# Altium PCB PCB_2D.PcbDoc (part 2 of 2)
Units mm, origin at the board's own origin, x right, y up, seen from the top; angles counter-clockwise.
Board outline 202 x 202 mm, 2 copper layers (Top Layer, Bottom Layer); 193 components, 102 nets, 533 pads, 52 vias.
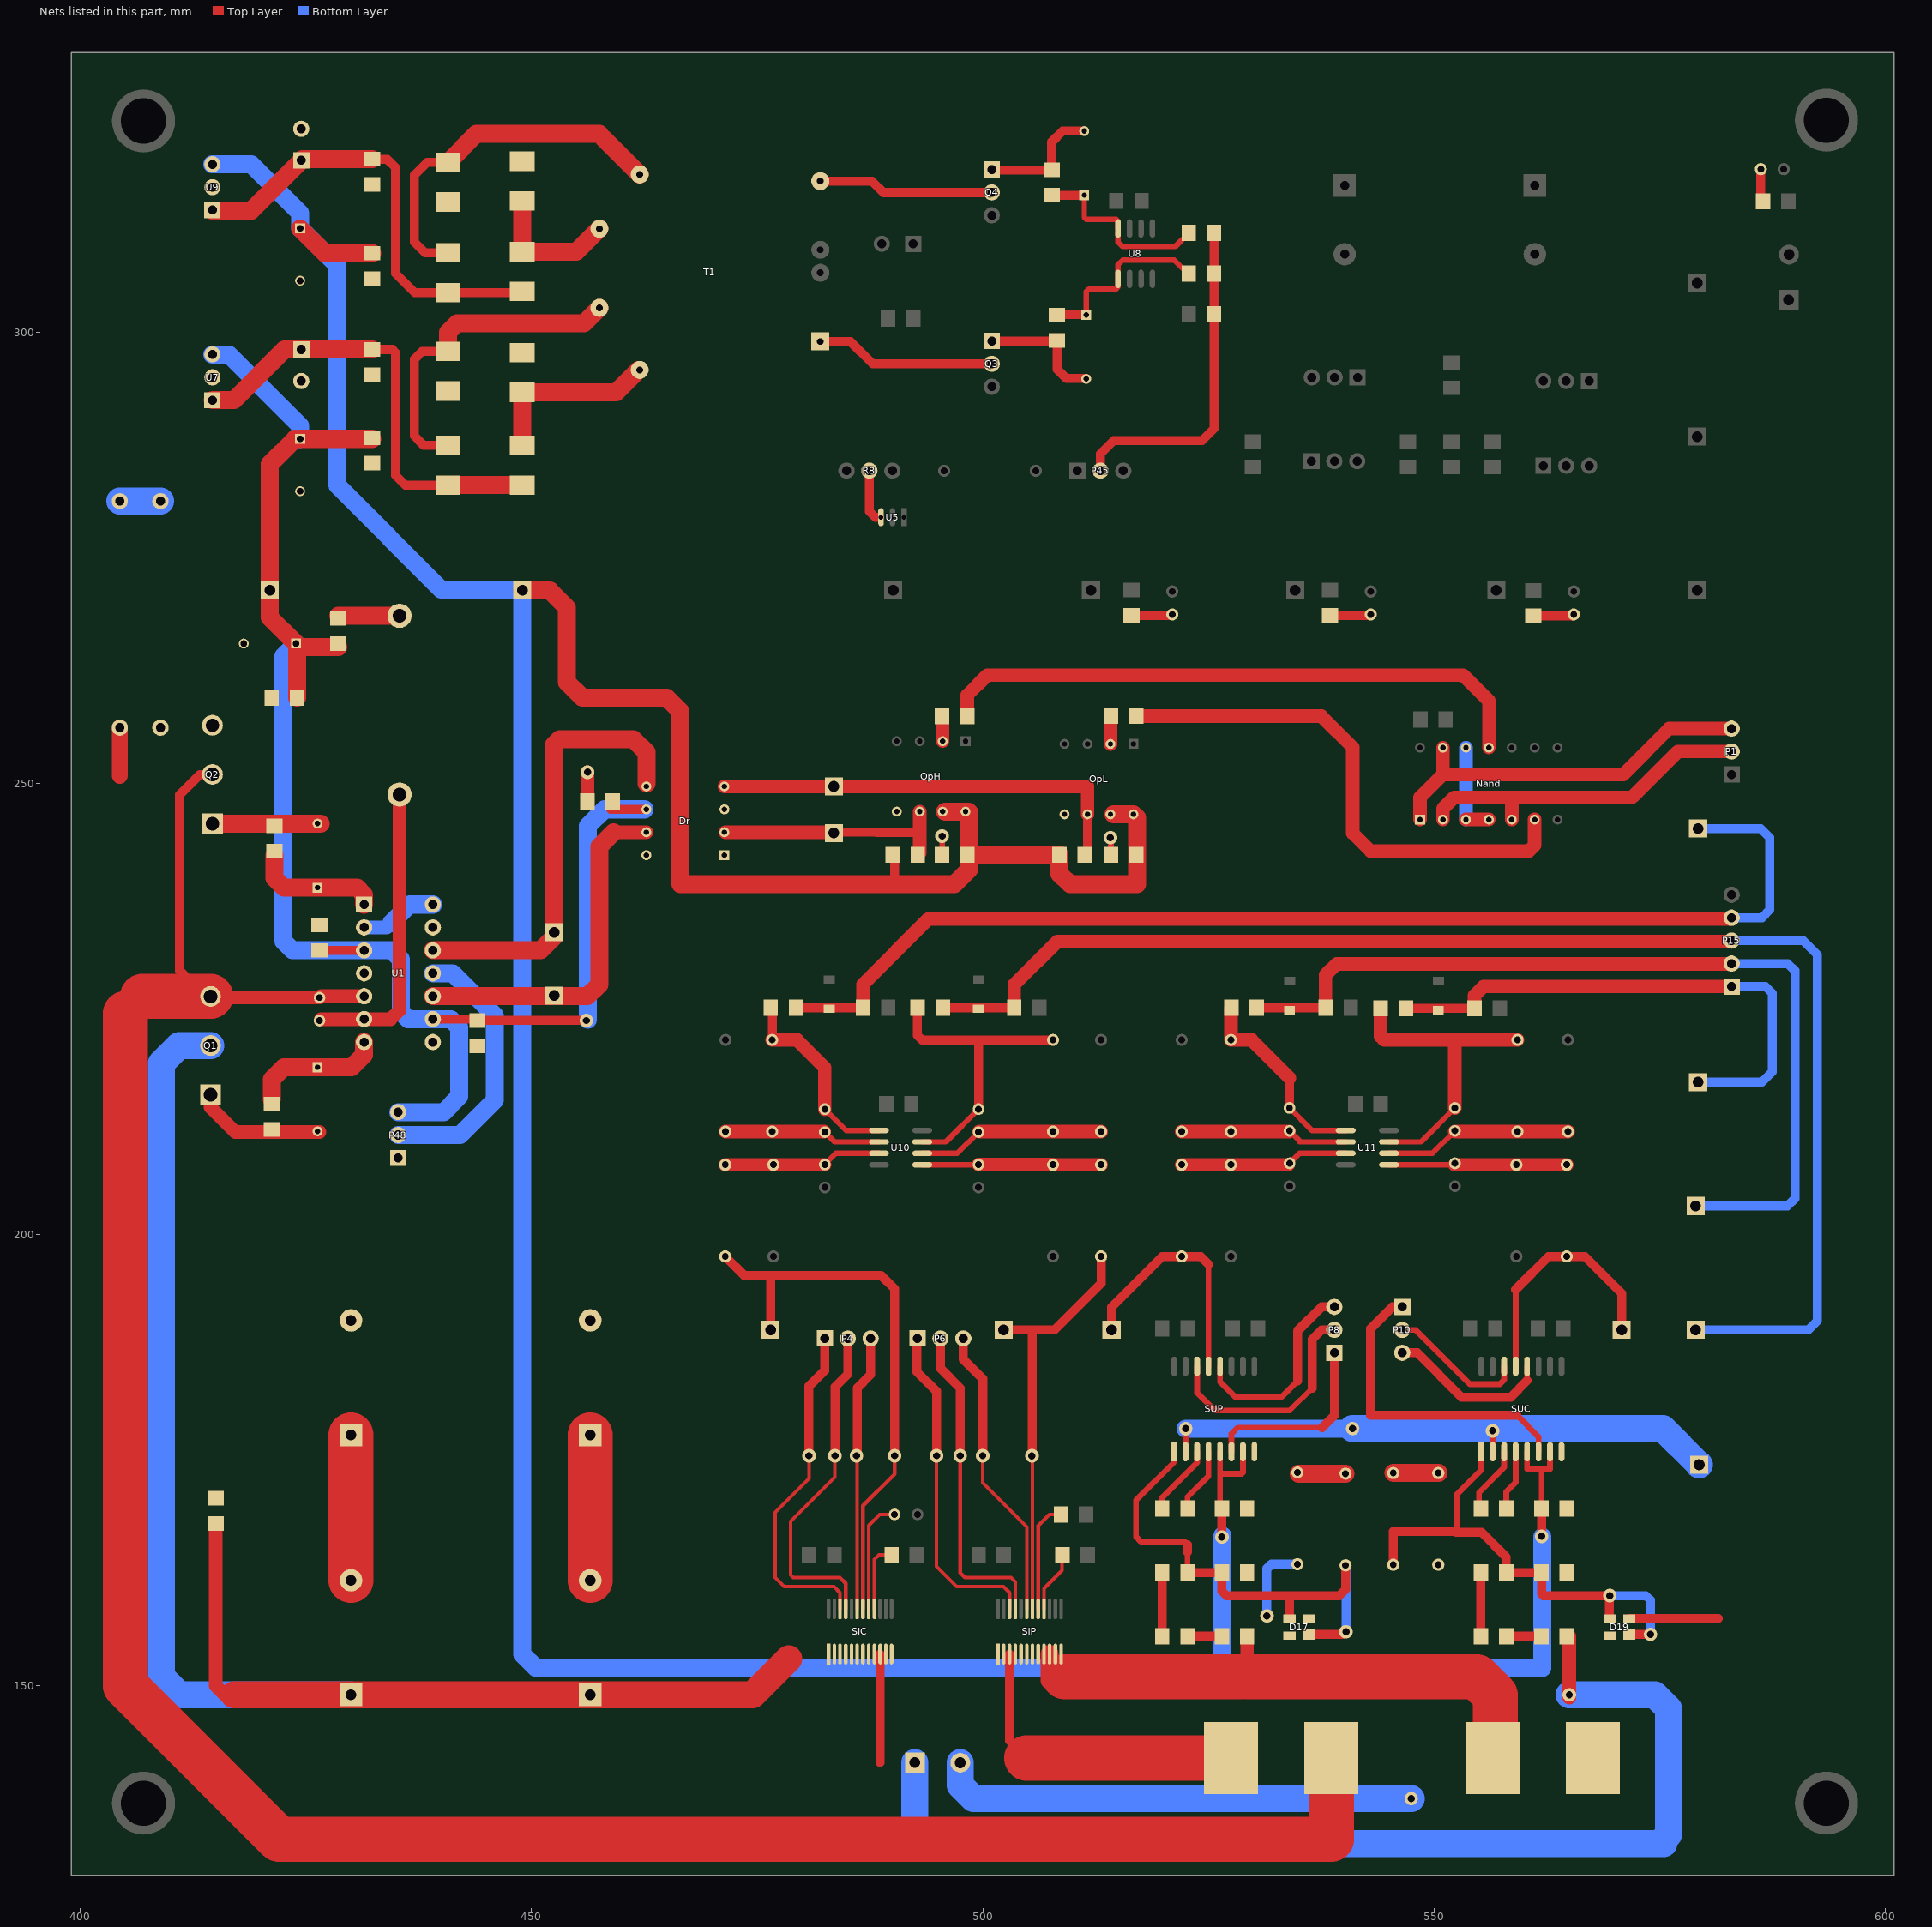
[diagram p2: the nets of this part, all layers, seen from the top]

## Via types
v1: diameter 1.5, hole 0.8, Top Layer to Bottom Layer, 51 vias
v2: diameter 1.27, hole 0.711, Top Layer to Bottom Layer, 1 vias

## Nets (pads, with @x,y where several pads share a name; then routed paths per layer and width w, separated by ;. In a path a pad name is that pad's centre, name@x,y a point inside that pad or via, vN(x,y) a via of type N, cw(c..) or ccw(c..) an arc to the next point about the centre after c; other vN are vias at no path point) (continued)
GNDP: C3.2 C4.2 C12.2 C13.2 C14.1 C15.1 C17.2 C18.2 C20.1 C21.1 C39.2 C44.2 C48.2 C53.2 C200.2 C202.2 C203.2 C204.2 C205.2 Cd1.2 Cd2.2 Cd4.2 CSnub.2 D6.1 D8.1 D10.1 D12.1 D17.2 D17.4 D19.2 D19.4 Dr.1 Dr.3 Dr.8 OpH.5 OpL.5 P2.2 P3.2 P48.1 pad.1 Q2.3 R32.2 R41.2 SUC.2 SUC.8 SUP.2 SUP.8 TP-GNDP1.1 U1.2 U1.4 U1.8 U1.13 U1.14 U7.3 U9.3 | length 150.9
  Top Layer w0.64: Cd1.2@495.498,242.096 v1(495.498,244.162) ; v1(514.153,244) 514.2,243.953 Cd2.2@514.2,242.096 ; SUP.2@522.485,175.946 522.485,178.485 v1(522.5,178.5) ; v1(556.5,178.258) 556.521,178.237 SUC.2@556.521,175.946
  Top Layer w1: C203.2@415,170.8 C203.2@415.2,171 ; D19.2@571.666,157.45 581.5,157.45
  Top Layer w1.5: Cd4.2@456.2,248 v1(456.2,251.249)
  Bottom Layer w1: v1(531.5,157.758) 531.361,157.758 531.31,157.81 531.5,158 531.5,163 531.982,163.482 R32.2@534.882,163.482
  Bottom Layer w1.5: U1.2@431.444,234.043 433.96,234.043
  Bottom Layer w2: 434.457,234.54 436.5,236.583 U1.14@439.064,236.583 ; v1(522.5,178.5) pad.1@541,178.5
  Bottom Layer w3: P2.2@497.515,141.475 497.515,138.985 499,137.5 v1(547.5,137.5) ; pad.1@541,178.5 575.401,178.5 TP-GNDP1.1@579.401,174.5
NetC1_1: C1.1 D1.2 U1.6 | length 33.7
  Top Layer w1: C1.1@426.5,223.73 C1.1@426.653,223.883
  Top Layer w1.5: C1.1@426.653,223.883 U1.6@431.444,223.883 434.383,223.883 435.373,224.873 435.373,242.096 ; 435.373,241.59 D1.2@435.373,248.768
NetC1_2: C1.2 P16.2 Q1.3 Q2.2 RSnub.2 U1.5 | length 282.6
  Top Layer w1: Q1.3@414,226.27 413.87,226.4 411,229.27 411,248.751 413.249,251 Q2.2@414.626,251
  Top Layer w1.5: Q1.3@414,226.27 C1.2@426.5,226.27 ; C1.2@426.653,226.423 U1.5@431.444,226.423
  Top Layer w1.8: 404.372,250.859 RSnub.2@404.372,256.182
  Top Layer w5: 405,224.5 405,150 422,133 538.629,133 P16.2@538.629,142 ; 406.9,226.4 413.87,226.4 Q1.3@414.426,226.4
NetC2_1: C2.1 C201.1 C203.1 Q1.2 SIC.1 SIC.2 SIC.3 SIC.4 SIC.5 SIC.6 | length 179.1
  Top Layer w1: C2.1@430,149 C2.1@430,149.5
  Top Layer w1.5: C203.1@415,168 415,150 416,149
  Top Layer w3: 417,149 C2.1@430,149 C201.1@456.5,149 474.5,149 478.5,153
  Bottom Layer w3: Q1.2@414.426,220.95 410.95,220.95 409,219 409,151 411,149 C2.1@430,149
NetC2_2: C2.2 C202.1 | length 16.8
  Top Layer w1: C202.1@430,177.8 C202.1@430,178.5
  Top Layer w5: C2.2@430,161.7 C202.1@430,177.8
NetC12_1: C12.1 C14.2 D4.2 D7.2 U7.1 | length 51.9
  Top Layer w1: C14.2@432.349,298.093 434.574,298.093 434.92,297.747 434.92,284.14 436,283.06 D7.2@440.731,283.06
  Top Layer w2: U7.1@414.669,292.503 417.029,292.503 422.619,298.093 C12.1@424.475,298.093 ; 425.5,298.093 C12.1@424.475,298.093 ; C14.2@432.349,298.093 C12.1@424.475,298.093 ; D7.2@440.731,283.06 D4.2@448.986,283.06
NetC17_1: C17.1 C20.2 D9.2 D11.2 U9.1 | length 49.5
  Top Layer w1: C17.1@424.475,319.05 C17.1@424.6,319.175 ; C20.2@432.349,319.175 434,319.175 434.92,318.255 434.92,306.533 437.057,304.396 D11.2@440.731,304.396 D9.2@448.859,304.396
  Top Layer w2: U9.1@414.704,313.46 418.885,313.46 C17.1@424.475,319.05 ; C17.1@424.6,319.175 C20.2@432.349,319.175
NetC23_1: C23.1 P45.2 R10.2 R11.1 | length 37.5
  Top Layer w1: P45.2@513.04,284.654 513.04,286.541 514.499,288 524.317,288 525.639,289.322 525.639,300.825 525.639,305.912 R10.2@525.639,306 ; R10.2@525.5,305.861 R10.2@525.639,306 ; R11.1@525.639,311 R10.2@525.639,306
NetC24_1: C24.1 R13.1 R14.2 U10.2 | length 17.5
  Top Layer w0.6: C24.1@482.449,211.416 C24.1@482.5,211.365 483.585,210.28 U10.2@488.496,210.28
  Top Layer w1.5: R14.2@471.5,211.416 R13.1@476.672,211.416 C24.1@482.449,211.416
NetC24_2: C24.2 R13.2 R15.1 U10.1 | length 22.1
  Top Layer w0.6: C24.2@482.5,213.905 484.855,211.55 U10.1@488.496,211.55
  Top Layer w1: R13.2@476.672,221.576 R15.1@476.672,224.973
  Top Layer w1.5: R13.2@476.672,221.576 479.424,221.576 482.5,218.5 C24.2@482.5,213.905
NetC27_1: C27.1 D14.1 P15.4 R15.2 TP-Icarga.1 | length 129.9
  Top Layer w1: R15.2@479.3,225.145 D14.1@482.86,225.145 ; D14.1@483.12,225.145 C27.1@486.721,225.145
  Top Layer w1.5: C27.1@486.721,225.145 486.721,227.721 494,235 P15.4@582.88,235
  Bottom Layer w1: TP-Icarga.1@579.283,245 586.23,245 587.23,244 587.23,236 586.35,235.12 P15.4@583,235.12
NetC28_1: C28.1 R16.2 R17.1 U10.3 | length 17.6
  Top Layer w0.6: C28.1@482.476,207.746 C28.1@482.5,207.77 483.74,209.01 U10.3@488.496,209.01
  Top Layer w1.5: R16.2@471.465,207.746 R17.1@476.799,207.746 C28.1@482.476,207.746
NetC29_1: C29.1 SIC.16 | length 7.6
  Top Layer w0.4: SIC.16@487.991,158.525 487.991,163.995 488.496,164.5 C29.1@489.896,164.5
NetC30_1: C30.1 R18.1 R19.2 U10.6 | length 20.7
  Top Layer w0.6: U10.6@493.296,209.01 497.187,209.01 C30.1@499.542,211.365
  Top Layer w1.5: C30.1@499.594,211.416 R18.1@507.787,211.416 R19.2@513.121,211.416
NetC30_2: C30.2 R18.2 R20.1 U10.7 | length 33.6
  Top Layer w0.6: U10.7@493.296,210.28 495.917,210.28 C30.2@499.542,213.905
  Top Layer w1: R20.1@492.77,225.145 492.77,222.102 493.296,221.576 502.977,221.576 R18.2@507.787,221.576 ; C30.2@499.542,213.905 499.542,221.525
NetC33_1: C33.1 D15.1 P15.3 R20.2 TP-Ipila.1 | length 156.5
  Top Layer w1: R20.2@495.57,225.145 C33.1@503.5,225.145
  Top Layer w1.5: C33.1@503.5,225.145 503.5,227.721 508.279,232.5 P15.3@582.92,232.5
  Bottom Layer w1: TP-Ipila.1@579,189.449 591.5,189.449 592.5,190.449 592.5,231.003 590.923,232.58 P15.3@583,232.58
NetC34_1: C34.1 R21.2 R22.1 U10.5 | length 19.8
  Top Layer w0.6: U10.5@493.296,207.74 C34.1@499.512,207.74
  Top Layer w1: C34.1@499.512,207.74 C34.1@499.542,207.77
  Top Layer w1.5: C34.1@499.542,207.77 R22.1@507.763,207.77 ; R22.1@507.787,207.746 R21.2@513.121,207.746
NetC35_1: C35.1 SIP.16 | length 6.8
  Top Layer w0.4: SIP.16@506.787,158.525 506.787,160.787 508.787,162.787 C35.1@508.787,164.5
NetC36_1: C36.1 R23.1 R28.2 U11.2 | length 18.7
  Top Layer w0.6: C36.1@534,211.5 535.114,210.386 ; 535.114,210.28 U11.2@540.226,210.28
  Top Layer w1: C36.1@533.916,211.416 C36.1@534,211.5
  Top Layer w1.5: R28.2@522.043,211.416 R23.1@527.504,211.416 C36.1@533.916,211.416
NetC36_2: C36.2 R23.2 R27.1 U11.1 | length 21.7
  Top Layer w0.6: C36.2@534,214.04 536.428,211.612 ; 536.49,211.55 U11.1@540.226,211.55
  Top Layer w1: C36.2@534,214.04 534,217.36
  Top Layer w1.5: R23.2@527.504,221.576 529.784,221.576 ; R23.2@527.504,221.932 R27.1@527.504,225.084 ; 529.905,221.455 534,217.36
NetC38_1: C38.1 D16.1 P15.2 R27.2 TP-Upila.1 | length 100.7
  Top Layer w1: R27.2@530.365,225.145 C38.1@538,225.145 ; P15.2@582.96,230 P15.2@583,230.04
  Top Layer w1.5: C38.1@538,225.145 538,228.774 539.226,230 P15.2@582.96,230
  Bottom Layer w1: TP-Upila.1@579,203.177 589.177,203.177 590,204 590,229.27 589.23,230.04 P15.2@583,230.04
NetC39_1: C39.1 D17.1 D17.3 R26.2 R30.1 SUP.1 | length 56.7
  Top Layer w0.64: SUP.1@521.215,175.946 521.215,174.8 517,170.585 517,166.5 517.5,166 522.339,166 522.693,165.646 ; R26.2@522.693,162.569 522.693,164.854
  Top Layer w1: R26.2@522.693,162.569 C39.1@526.5,162.569 526.5,160.5 527,160 539.5,160 540.216,160.716 R30.1@540.216,163.355 ; 522.693,164.854 522.693,165.646 ; D17.3@533.994,157.45 533.994,159.506 ; D17.1@536.194,155.7 539.958,155.7 v1(540.258,156)
  Bottom Layer w1: R30.1@540.216,163.355 540.258,163.313 v1(540.258,156)
NetC40_1: C40.1 SUP.3 | length 7.9
  Top Layer w0.64: C40.1@519.893,169.637 519.893,170.893 523.755,174.755 SUP.3@523.755,175.946
NetC40_2: C40.2 SUP.4 | length 7.3
  Top Layer w0.64: C40.2@522.693,169.637 522.693,170.938 525.025,173.27 SUP.4@525.025,175.946
NetC41_1: C41.1 R29.2 R31.1 U11.3 | length 18.7
  Top Layer w0.6: C41.1@534.009,207.905 535.104,209 ; 535.114,209.01 U11.3@540.226,209.01
  Top Layer w1: C41.1@533.849,207.746 C41.1@534.009,207.905
  Top Layer w1.5: R29.2@522.043,207.746 R31.1@527.504,207.746 C41.1@533.849,207.746
NetC45_1: C45.1 R33.1 R37.2 U11.6 | length 20.9
  Top Layer w0.6: U11.6@545.026,209.01 549.839,209.01 C45.1@552.33,211.5
  Top Layer w1.5: C45.1@552.33,211.416 R37.2@564.851,211.416
NetC45_2: C45.2 R33.2 R38.1 U11.7 | length 34.7
  Top Layer w0.6: U11.7@545.026,210.28 548.569,210.28 C45.2@552.33,214.04
  Top Layer w1.5: R38.1@544.094,225.084 544.094,221.982 544.5,221.576 R33.2@559.263,221.576 ; C45.2@552.33,214.04 552.33,221.406
NetC47_1: C47.1 D18.1 P15.1 R38.2 TP-Ucarga.1 | length 60.1
  Top Layer w1: R38.2@546.894,225.084 C47.1@554.5,225.084
  Top Layer w1.5: C47.1@554.5,225.084 554.5,226.5 555.5,227.5 P15.1@583,227.5
  Bottom Layer w1: TP-Ucarga.1@579.283,216.906 586.356,216.906 587.5,218.05 587.5,226.73 586.73,227.5 P15.1@583,227.5
NetC48_1: C48.1 D19.1 D19.3 R36.2 R39.1 SUC.1 | length 56.3
  Top Layer w0.64: 552.5,167.094 552.5,171.169 555.251,173.92 SUC.1@555.251,175.946 ; R36.2@558.011,162.569 R36.2@558.011,163
  Top Layer w1: R39.1@545.5,163.42 545.5,167.094 552.5,167.094 ; 552.5,167 555.291,167 558.011,164.28 R36.2@558.011,163 ; R36.2@558.011,162.569 C48.1@561.93,162.569 561.93,160.198 562.128,160 v1(569.5,160) ; D19.3@569.466,157.45 v1@569.466,159.966 ; D19.1@571.666,155.7 v1(574,155.7)
  Bottom Layer w1: v1(569.5,160) 573.5,160 574,159.5 v1(574,155.7)
NetC49_1: C49.1 SUC.3 | length 7.3
  Top Layer w0.64: C49.1@555,169.848 555,171.414 557.791,174.204 SUC.3@557.791,175.946
NetC49_2: C49.2 SUC.4 | length 6.7
  Top Layer w0.64: C49.2@558.011,169.637 558.011,171.5 559.061,172.55 SUC.4@559.061,175.946
NetC50_1: C50.1 R40.2 R42.1 U11.5 | length 19.4
  Top Layer w0.6: U11.5@545.026,207.74 C50.1@552,207.74
  Top Layer w1.5: C50.1@552.33,207.746 R40.2@564.724,207.746
NetC200_1: C200.1 C201.2 | length 16.1
  Top Layer w5: C201.2@456.5,161.7 C200.1@456.5,177.8
NetCF1_2: CF1.2 SIC.17 | length 12.6
  Top Layer w0.4: SIC.17@487.356,158.525 487.356,167.776 488.58,169 CF1.2@490.23,169
NetCF2_2: CF2.2 SIP.17 | length 12.3
  Top Layer w0.4: SIP.17@506.152,158.525 506.152,167.758 507.394,169 CF2.2@508.666,169
NetCsnub_1: CSnub.1 RSnub.1 | length 5.5
  Bottom Layer w1: RSnub.1@403.577,280.886 RSnub.1@404.305,281.614
  Bottom Layer w3: RSnub.1@404.372,281.278 CSnub.1@408.872,281.278
NetD1_1: D1.1 R1.2 | length 6.8
  Top Layer w2: R1.2@428.6,268.58 D1.1@435.373,268.58
NetD2_1: D2.1 Q1.1 R2.2 | length 14.4
  Top Layer w1.5: Q1.1@414.426,215.5 414.426,214.105 417.166,211.365 R2.2@421.5,211.365 ; R2.2@421.665,211.365 D2.1@426.5,211.365
NetD2_2: D2.2 R2.1 U1.7 | length 15
  Top Layer w2: R2.1@421.2,215 421.2,217.2 422.55,218.55 D2.2@426.285,218.55 430.05,218.55 431.441,219.941 U1.7@431.441,221.343
NetD3_1: D3.1 Q2.1 R6.2 | length 11.7
  Top Layer w2: Q2.1@414.976,245.55 D3.1@426.635,245.55
NetD3_2: D3.2 R6.1 U1.1 | length 14.3
  Top Layer w2: R6.1@421.5,242 421.5,239.5 422.55,238.45 D3.2@426.285,238.45 430.651,238.45 431.444,237.657 U1.1@431.444,236.583
NetD4_1: D4.1 D6.2 T1.5 | length 19.8
  Top Layer w2: D4.1@448.986,287.46 D6.2@448.986,293.347 459.373,293.347 T1.5@461.852,295.826
NetD5_1: D5.1 Q3.1 R9.2 | length 14.1
  Top Layer w1: Q3.1@501,299.04 R9.2@508.173,299.04 ; R9.2@508.237,299.128 508.237,295.903 509.265,294.875 D5.1@511.466,294.875
NetD5_2: D5.2 R9.1 R10.1 U8.1 | length 20.7
  Top Layer w0.6: D5.2@511.483,301.951 511.483,304.506 511.776,304.799 514.799,304.799 515,305 U8.1@515,305.912 515,307.5 515.5,308 521.215,308 R10.1@522.839,306.375
  Top Layer w1: R9.1@508.26,301.951 D5.2@511.466,301.951
NetD7_1: D7.1 D8.2 T1.6 | length 36.9
  Top Layer w1: D7.1@440.731,287.46 438.04,287.46 437,288.5 437,297 437.874,297.874 D8.2@440.731,297.874 D8.2@440.874,297.874
  Top Layer w2: D8.2@440.731,297.874 440.731,300 441.731,301 444,301 455.805,301 T1.6@457.514,302.71
NetD9_1: D9.1 D10.2 T1.7 | length 15.6
  Top Layer w1: T1.7@457.514,311.064 T1.7@457.514,311.473
  Top Layer w2: D10.2@448.986,314.556 D9.1@448.986,308.923 454.965,308.923 T1.7@457.514,311.473
NetD11_1: D11.1 D12.2 T1.8 | length 40.4
  Top Layer w1: D11.1@440.731,308.796 438.204,308.796 437,310 437,317.397 438.432,318.829 D12.2@440.731,318.829 ; 457.5,322 458,321.5 458,321.477
  Top Layer w2: D12.2@440.731,318.829 443.902,322 457.5,322 ; 458,321.477 T1.8@461.985,317.493
NetD13_1: D13.1 Q4.1 R12.2 | length 13.9
  Top Layer w1: Q4.1@501,318.04 501.049,317.991 R12.2@507.647,317.991 507.647,321.09 508.848,322.291 D13.1@511.254,322.291
NetD13_2: D13.2 R11.2 R12.1 U8.8 | length 20.5
  Top Layer w0.6: D13.2@511.254,315.191 511.254,312.729 511.483,312.5 514.799,312.5 515,312.299 U8.8@515,311.5 ; U8.8@515,311.088 515,310 515.5,309.5 521.339,309.5 R11.2@522.839,311
  Top Layer w1: R12.1@507.647,315.191 D13.2@511.254,315.191
NetDL5_1: DL5.1 RL5.1 | length 4.3
  Top Layer w1: RL5.1@561,268.58 DL5.1@565.35,268.58
NetDL12_1: DL12.1 RL12.1 | length 4.4
  Top Layer w1: RL12.1@538.5,268.629 DL12.1@542.899,268.629
NetDL15_1: DL15.1 RL15.1 | length 4.4
  Top Layer w1: RL15.1@516.5,268.629 DL15.1@520.899,268.629
NetDL24_1: DL24.1 RL24.1 | length 3.3
  Top Layer w1: RL24.1@586.23,314.747 DL24.1@586.23,318.078
NetDr_2: Dr.2 OpH.6 Rd1.2 TP-OpH.1 | length 26.1
  Top Layer w1: TP-OpH.1@483.5,244.59 492.696,244.5 ; Rd1.2@492.8,242.096 Rd1.2@493.016,242.312
  Top Layer w1.5: Dr.2@471.47,244.59 TP-OpH.1@483.5,244.59 ; Rd1.2@493.016,242.312 OpH.6@493.016,246.88
NetDr_4: Dr.4 OpL.6 Rd2.2 TP-OpL.1 | length 47.8
  Top Layer w1: Rd2.2@511.613,242.096 OpL.6@511.613,246.58
  Top Layer w1.5: Dr.4@471.379,249.672 511.613,249.672 OpL.6@511.613,246.58
NetDr_5: Dr.5 TP-Lin.1 U1.12 | length 49.9
  Top Layer w2: U1.12@439.064,231.503 451.003,231.503 452.5,233 452.5,254.268 453.124,254.892 461.288,254.892 462.73,253.45 Dr.5@462.73,250
NetDr_7: Dr.7 TP-Hin.1 U1.10 | length 40.1
  Top Layer w1.5: 459.09,244.59 Dr.7@462.73,244.59
  Top Layer w2: U1.10@439.064,226.423 456.2,226.423 457.5,227.723 457.5,243 459.09,244.59
NetNand_1: Nand.1 Nand.13 P1.3 | length 43.1
  Top Layer w1.5: Nand.1@548.466,246 548.466,248.46 551.006,251 ; Nand.13@551.006,253.976 551.006,251 ; P1.3@583,256.08 576.08,256.08 571,251 551.006,251
NetNand_2: Nand.2 Nand.5 P1.2 | length 37.9
  Top Layer w1.5: Nand.2@551.006,246 551.006,247.211 552.255,248.46 571.96,248.46 ; Nand.5@558.626,246 558.626,248.126 ; 572,248.5 577.04,253.54 P1.2@583,253.54
NetNand_3: Nand.3 Nand.4 Nand.12 | length 10.5
  Top Layer w1.5: Nand.3@553.546,246 Nand.4@556.086,246
  Bottom Layer w1.5: Nand.3@553.546,246 Nand.12@553.546,253.976
NetNand_6: Nand.6 Rl2.1 | length 59
  Top Layer w1.5: Rl2.1@517,257.454 537.546,257.454 541,254 541,244.5 543,242.5 560.5,242.5 561.166,243.166 Nand.6@561.166,246
NetNand_11: Nand.11 Rl1.1 | length 67.2
  Top Layer w1.5: Rl1.1@498.298,257.702 498.298,259.798 500.5,262 553.251,262 556.086,259.164 Nand.11@556.086,253.976
NetOpH_2: OpH.2 Rl1.2 | length 2.6
  Top Layer w1.5: OpH.2@495.556,254.68 Rl1.2@495.556,257.24
NetOpL_2: OpL.2 Rl2.2 | length 3.1
  Top Layer w1.5: OpL.2@514.153,254.38 Rl2.2@514.153,257.453
NetP2_1: P2.1 R34.1 SIC.7 SIC.8 SIC.9 SIC.10 SIC.11 SIC.12 | length 136.8
  Top Layer w1: 488.626,141.5 SIC.10@488.626,153.525
  Top Layer w1.5: v1@565,148.702 v1(565,149) R34.1@565,155.5
  Bottom Layer w3: P2.1@492.485,141.5 492.485,134.015 494,132.5 575.5,132.5 575.5,133 576,133.5 576,147.5 574.5,149 v1(565,149)
NetP3_1: P3.1 R24.1 SIP.7 SIP.8 SIP.9 SIP.10 SIP.11 SIP.12 | length 60.5
  Top Layer w1.5: 529.3,151 R24.1@529.3,155.5
  Top Layer w2: SIP.10@507.422,153.525 507.422,150.578 507.844,151 509.073,151
  Top Layer w5: 509.073,151 528.5,151 ; 529.3,151 554.751,151 556.8,148.951 P3.1@556.8,145.5
NetP4_1: P4.1 SIC.22 | length 38.4
  Top Layer w0.4: v1@480.746,176 480.746,172.969 477,169.223 477,162 478,161 483.5,161 484.181,160.319 SIC.22@484.181,158.525
  Top Layer w1: v1@480.746,176 480.746,183.197 482.5,184.951 P4.1@482.5,188.5
  other v1: 480.746,175.5
NetP4_2: P4.2 SIC.21 | length 38.2
  Top Layer w0.4: v1@483.617,176 483.617,173.117 478.715,168.215 478.715,162.285 479,162 484.181,162 484.816,161.365 SIC.21@484.816,158.525
  Top Layer w1: v1@483.617,176 483.617,183.117 485.04,184.54 P4.2@485.04,188.5
  other v1: 483.617,175.5
NetP4_3: P4.3 SIC.19 | length 30.6
  Top Layer w0.4: SIC.19@486.086,158.525 v1@486.086,176
  Top Layer w1: v1@486.086,176 486.086,183.006 487.58,184.5 P4.3@487.58,188.5
  other v1: 486,175.5
NetP6_1: P6.1 SIP.22 | length 37.2
  Top Layer w0.4: v1(494.873,175.5) 494.873,163.234 497.108,161 502.296,161 502.977,160.319 SIP.22@502.977,158.525
  Top Layer w1: P6.1@492.696,188.426 492.696,184.804 494.873,182.627 v1(494.873,175.5)
NetP6_2: P6.2 SIP.21 | length 36.4
  Top Layer w0.4: v1@497.5,176.064 497.5,162.531 498.031,162 503.149,162 503.612,161.537 SIP.21@503.612,158.525
  Top Layer w1: P6.2@495.31,188.5 495.31,185.19 497.5,183 v1@497.5,176.033
  other v1: 497.5,175.5
NetP6_3: P6.3 SIP.19 | length 32.9
  Top Layer w0.4: v1(500,175.5) 500,172.5 504.882,167.618 SIP.19@504.882,158.525
  Top Layer w1: P6.3@497.85,188.5 497.85,186.19 500,184.04 v1(500,175.5)
NetP8_1: P8.1 SUP.6 | length 21.2
  Top Layer w0.6: 528.237,178.607 537.607,178.607
  Top Layer w0.64: SUP.6@527.565,175.946 527.565,177.935 528.237,178.607
  Top Layer w1: 537.607,178.607 539,180 P8.1@539,186.909
NetP8_2: P8.2 SUP.14 | length 25.8
  Top Layer w0.6: 525.755,180.5 534,180.5 536.5,183
  Top Layer w0.64: SUP.14@523.755,185.416 523.755,182.5 525.755,180.5
  Top Layer w1: 536.5,183 536.5,188.403 537.546,189.449 P8.2@538.968,189.449
NetP8_3: P8.3 SUP.12 | length 22.5
  Top Layer w0.64: SUP.12@526.295,185.416 526.295,183.705 528.044,181.956 ; 528.044,182 533.103,182 534.882,183.779
  Top Layer w1: 534.882,183.779 534.882,189.325 537.546,191.989 P8.3@538.968,191.989
NetP10_1: P10.1 SUC.6 | length 35.3
  Top Layer w0.64: 559.193,180 561.601,177.592 SUC.6@561.601,175.946
  Top Layer w1: P10.1@546.5,191.989 545.39,191.989 543,189.599 543,180 559.193,180
NetP10_2: P10.2 SUC.14 | length 15.5
  Top Layer w0.64: P10.2@546.5,189.449 547.954,189.449 553.97,183.433 557.3,183.433 557.791,183.923 SUC.14@557.791,185.416
NetP10_3: P10.3 SUC.12 | length 18.2
  Top Layer w0.64: 560.331,183.82 SUC.12@560.331,185.416
  Top Layer w1: P10.3@546.5,186.909 548.16,186.909 553.069,182 558.511,182 560.331,183.82
NetP16_1: P16.1 SIP.1 SIP.2 SIP.3 SIP.4 SIP.5 SIP.6 | length 32.2
  Top Layer w1: 502.977,143.905 SIP.3@502.977,153.525
  Top Layer w5: 504.882,142 P16.1@527.504,142
NetP48_2: P48.2 U1.11 | length 30.5
  Bottom Layer w2: P48.2@435.23,211.04 442.063,211.04 445.927,214.904 445.927,224.3 441.264,228.963 U1.11@439.064,228.963
NetQ3_2: Q3.2 T1.1 | length 20
  Top Layer w1: T1.1@482,298.976 485.317,298.976 487.793,296.5 Q3.2@501,296.5
NetQ4_2: Q4.2 T1.4 | length 19.5
  Top Layer w1: T1.4@482,316.756 487.72,316.756 488.993,315.483 Q4.2@501,315.483
NetR8_2: R8.2 U5.3 | length 5.9
  Top Layer w1: R8.2@487.439,284.654 487.439,280.141 488.08,279.5 U5.3@488.58,279.5
NetR16_1: R16.1 SIC.18 TP-UI2.1 | length 63.2
  Top Layer w0.4: SIC.18@486.721,158.525 486.721,169.96 490.23,173.469 v1@490.23,176.033
  Top Layer w1: R16.1@471.465,197.586 473.551,195.5 476.5,195.5 ; TP-UI2.1@476.5,189.449 476.5,195.5 ; v1@490.23,176.033 490.23,193.996 488.726,195.5 476.5,195.5
  other v1: 490.23,175.5
NetR21_1: R21.1 SIP.18 TP-UI1.1 | length 46.8
  Top Layer w0.4: 505.5,189.449 505.517,189.449 ; SIP.18@505.517,158.525 v1@505.517,176.064
  Top Layer w1: TP-UI1.1@502.31,189.449 505.5,189.449 v1@505.5,176.081 ; 505.517,189.449 507.949,189.449 513.121,194.621 R21.1@513.121,197.586
  other v1: 505.459,175.486
NetR24_2: R24.2 R25.1 | length 3.8
  Top Layer w1: R25.1@522.693,155.502 R24.2@526.5,155.502
NetR25_2: R25.2 R26.1 | length 7.1
  Top Layer w1: R25.2@519.893,155.502 R26.1@519.893,162.569
NetR29_1: R29.1 SUP.13 TP-A1.1 | length 27.3
  Top Layer w0.64: SUP.13@525.025,185.416 525.025,196.73
  Top Layer w1: TP-A1.1@514.28,189.449 514.28,191.972 519.893,197.586 R29.1@522.043,197.586 524.169,197.586 525.025,196.73
NetR30_2: R30.2 R32.1 | length 5.2
  Top Layer w2: R32.1@535.009,173.515 R30.2@540.216,173.515
NetR34_2: R34.2 R35.1 | length 3.9
  Top Layer w1: R35.1@558.011,155.502 R34.2@561.924,155.502
NetR35_2: R35.2 R36.1 | length 7.1
  Top Layer w1: R35.2@555.211,155.502 R36.1@555.211,162.569
NetR39_2: R39.2 R41.1 | length 5
  Top Layer w2: R39.2@545.5,173.58 R41.1@550.49,173.58
NetR40_1: R40.1 SUC.13 TP-A2.1 | length 26.8
  Top Layer w0.64: SUC.13@559.061,185.416 559.061,193.933
  Top Layer w1: 559.061,193.933 562.713,197.586 564.022,197.586 ; R40.1@564.724,197.586 566.736,197.586 570.82,193.502 TP-A2.1@570.82,189.449
P_5V: C18.1 C21.2 C44.1 C53.1 Cd1.1 Cd2.1 OpH.7 OpH.8 OpL.7 OpL.8 Rd1.1 Rd2.1 SUC.5 SUC.7 SUP.5 SUP.7 TP-P5v.1 U9.2 | length 491
  Top Layer w0.64: C44.1@526.295,169.842 526.295,173.5 ; SUP.5@526.295,175.946 526.295,173.5 ; SUP.7@528.835,175.946 528.835,173.642 528.692,173.5 526.295,173.5 ; SUC.5@560.331,175.946 560.331,174 562.858,174 ; C53.1@561.93,169.637 561.93,173.664 ; 562.871,174.013 SUC.7@562.871,175.946
  Top Layer w1: 490.244,238.819 Rd1.1@490.244,242.096 ; v1@526.506,166.707 C44.1@526.506,169.774 ; v1(561.93,166.57) C53.1@561.93,169.637
  Top Layer w2: C18.1@424.35,311.511 427.1,308.761 C21.2@432.349,308.761 ; TP-P5v.1@448.986,271.399 452.03,271.399 453.929,269.5 453.929,261.214 455.643,259.5 465,259.5 466.5,258 466.5,238.819 490.244,238.819 496.859,238.819 498.5,240.46 498.5,242.096 Cd1.1@498.504,242.096 ; OpH.7@495.8,246.88 OpH.8@498.096,246.88 ; OpH.8@498.408,246.88 498.504,246.758 Cd1.1@498.504,242.096 ; 498.504,240.742 Cd1.1@498.504,242.096 ; Rd2.1@508.057,242.096 Cd1.1@498.504,242.096 ; Rd2.1@508.5,242.096 508.5,240 509.681,238.819 517.085,238.819 517.085,246.188 OpL.8@516.693,246.58 OpL.7@514.5,246.58
  Bottom Layer w0.64: v1(561.93,166.57) v1@562,166.5
  Bottom Layer w1: 562,152 562.514,152
  Bottom Layer w2: U9.2@414.626,318.618 418.922,318.618 424.35,313.19 C18.1@424.35,311.511 ; C18.1@424.431,311.43 428.465,307.396 428.465,283.035 440,271.5 TP-P5v.1@448.986,271.5 ; TP-P5v.1@448.986,271.399 448.986,153.5 450.486,152 526.576,152 ; v1@526.576,166.637 526.576,152 ; v1@562,166.5 562,152 526.576,152
  other v1: 526.506,166.5
P_15V: C3.1 C4.1 C13.1 C15.2 C204.1 C205.1 Cd4.1 Dr.6 P48.3 R1.1 TP-P15v.1 U1.3 U1.9 U7.2 | length 188
  Top Layer w1: C4.1@426.5,231.5 U1.3@431.441,231.5 ; U1.9@439.064,223.883 443.847,223.883 C3.1@444,223.73 v1(456.079,223.73) ; Cd4.1@458.761,247.13 Dr.6@462.73,247.13 ; Cd4.1@459,247.726 Cd4.1@459,248
  Top Layer w2: C13.1@423.802,288.183 421,285.381 TP-P15v.1@421,271.399 421,268.4 C204.1@423.9,265.5 ; C205.1@424,259.5 424,265.1 R1.1@428.6,265.1 ; C13.1@424.35,288.183 C15.2@432.349,288.183
  Bottom Layer w2: U7.2@414.626,297.54 416.46,297.54 424.35,289.65 C13.1@424.35,288.183 ; C204.1@423.9,265.5 422.5,264.1 422.5,232.5 423.497,231.503 434.497,231.503 435.5,230.5 435.5,224.73 436.347,223.883 441.074,223.883 442,222.957 442,215.305 440.275,213.58 P48.3@435.23,213.58 ; v1@456.243,223.838 456.243,245.293 458.08,247.13 Dr.6@462.5,247.13
pads on no net: Nand.8

## Polygon pours and split planes (outlines as drawn)
C_24V on Top Layer "Top Layer-No Net" (solid, pour order 7): 538,318.5 570.82,318.5 571,318.32 571,310.5 590.27,310.5 590.27,307.5 571,307.5 571,293.347 566,293.347 566,297.5 568,297.5 568,314 568,315.191 567.809,315 538,315
GNDP on Top Layer "GNDP" (solid, pour order 6): 600,179.5 515,179.5 515,166.57 515,155.7 477.3,155.7 477,156 472.5,160.5 472.5,187 459.5,200 459.5,238 460,238.5 460.05,238.45 527,238.45 527,250.5 526.63,250.87 473.5,250.87 473.5,279 468,284.5 468,330 400,330 400,130 600,130 600,179.5
GNDC on Bottom Layer "Top Layer-No Net" (solid, pour order 8): 470,329.905 470.095,330 600,330 600,181.5 514,181.5 514,181.379 513.121,180.5 513.121,157 478.5,157 474.5,161 474.5,188 461.5,201 461.509,201.009 461.509,236.583 528,236.583 528.917,237.5 529,237.5 529,251.5 528,252.5 475.5,252.5 475.5,279.5 475.5,280 470,285.5 470,329.905
GNDP on Bottom Layer "GNDP" (solid, pour order 5): 600,179.5 515,179.5 515,166.57 515,155.7 477.3,155.7 477,156 472.5,160.5 472.5,187 459.5,200 459.5,238 460,238.5 460.05,238.45 527,238.45 527,250.5 526.63,250.87 473.5,250.87 473.5,279 468,284.5 468,330 400,330 400,130 600,130 600,179.5

## Other copper
Top Layer:
  rectangle net GNDP: 563.812,173 564.851,178.237
  rectangle net GNDP: 529.776,172.746 530.5,177.296
  rectangle net GNDC: 501.239,156 502.356,160
  rectangle net GNDC: 507.284,156 508.735,160
  rectangle net GNDC: 502.356,156 508.26,156.5
  rectangle net GNDC: 483.617,156 489.521,156.5
  rectangle net GNDC: 488.545,156 489.996,160
  rectangle net GNDC: 482.5,156 483.617,160
  rectangle net NetP3_1: 505.459,152 509,154.511
  rectangle net NetP16_1: 501.5,152 504.888,154.5
  rectangle net NetC2_1: 478.5,147.489 486.086,154.5
  rectangle net NetP3_1: 505.459,148.5 509,153
  rectangle net NetP16_1: 501.5,139.5 504.888,152
  rectangle net NetP2_1: 486.721,139.5 494,154.5
  rectangle net NetP3_1: 553.546,139 559.5,149
  rectangle net NetC1_2: 402.517,224.5 412,252.5
  rectangle net NetC1_2: 410.5,249.5 415.5,252.5
  rectangle net NetC2_1: 474.811,147.5 479.5,151.5
  text "CARAVELLI - IRUSTA" at 598.166,144.5 h1.8 r90
  text "LEICI - FI UNLP - 2011" at 594.166,142 h1.8 r90

## Silkscreen, mask and mechanical layers (free items; w line width, h text height)
Top Overlay:
  text "+" at 595,307.846 h1.52
  text "5v" at 508,281.5 h1.52
  text "12v" at 514.28,281.5 h1.52
  text "Hin" at 596,257.453 h1.52
  text "Lin" at 596,254 h1.52
  text "GNDC" at 594,248 h1.52
  text "GNDC" at 594,238.5 h1.52
  text "Ic" at 597,234.5 h1.52
  text "Ip" at 597,232 h1.52
  text "Up" at 597,229 h1.52
  text "Uc" at 597,226.27 h1.52
  text "OFF" at 439.064,212.811 h1.52
  text "ON" at 439,207.5 h1.52
  text "Vo" at 532.999,191.5 h1.52
  text "VL" at 549.893,191.489 h1.52
  text "/F" at 549.781,188.82 h1.52
  text "/F" at 533.02,188.5 h1.52
  text "VL" at 533.252,186 h1.52
  text "Vo" at 549.999,185.967 h1.52
  text "Fe" at 493.369,182.248 h1.52 r90
  text "Fe" at 482.911,182 h1.52 r90
  text "/F" at 488.496,182 h1.52 r90
  text "/F" at 499,182 h1.52 r90
  text "Voc" at 485.451,180.64 h1.52 r90
  text "Voc" at 496,180.64 h1.52 r90
  text "+" at 556,148.951 h1.52
  text "+" at 487,141 h1.52
  text "CARGA" at 491.5,132 h1.52
  text "PILA" at 560.5,131.539 h1.52
  text "INDUCTOR" at 528,131.5 h1.52
Mechanical 1:
  the board outline again, w0.254
Mechanical 2:
  lines w1: 478.094,156.119 513.85,156.119 514.2,156.469
  lines w2: 469,284.654 469,330 ; 469,284.992 474.5,279.492 474.5,251.5 527.7,251.5 ; 473.5,184 473.5,187.5 460.5,200.5 460.5,204 460.5,237.66 521.66,237.66 ; 473.5,184.5 473.5,160.713 478.094,156.119 ; 514.28,156.685 514.28,180.5 600,180.5 ; 520.053,237.66 527.7,237.66 527.7,251
Drill Drawing:
  text "Drill Drawing." at 465.656,216.529 h1.52

## Text inside footprints (layer, text, board x,y; h text height)
C2: Top Overlay "+" at 438.675,142.5 h1.5 r270
C7: Top Overlay "+" at 540.873,323.503 h1.5 r90
C9: Top Overlay "+" at 561.066,323.376 h1.5 r90
C12: Top Overlay "+" at 423.725,301.818 h1.5 r270
C13: Top Overlay "+" at 425,289 h1.5 r90
C16: Top Overlay "+" at 496.025,310.55 h1.5 r180
C17: Top Overlay "+" at 425.225,315.325 h1.5 r90
C18: Top Overlay "+" at 423.6,314.086 h1.5 r270
C200: Top Overlay "+" at 465.5,173 h1.5 r270
C201: Top Overlay "+" at 465.5,142.5 h1.5 r270
C202: Top Overlay "+" at 438.675,173 h1.5 r270
C204: Top Overlay "+" at 425.5,264.5 h1.5 r180
Q1: Top Overlay "1" at 419.001,215.5 h1.5 r90; Top Overlay "2" at 419.001,220.442 h1.5 r90; Top Overlay "3" at 419.001,225.892 h1.5 r90
Q2: Top Overlay "1" at 419.201,245.55 h1.5 r90; Top Overlay "2" at 419.201,250.492 h1.5 r90; Top Overlay "3" at 419.201,255.942 h1.5 r90
Q3: Top Overlay "2" at 497.325,297 h1.5 r270; Top Overlay "3" at 497.325,294.46 h1.5 r270; Top Overlay "1" at 497.325,299.29 h1.5 r270
Q4: Top Overlay "2" at 497.325,316 h1.5 r270; Top Overlay "3" at 497.325,313.46 h1.5 r270; Top Overlay "1" at 497.325,318.29 h1.5 r270
U2: Top Overlay "1" at 567.458,298.268 h1.5 r180; Top Overlay "2" at 562.628,298.268 h1.5 r180; Top Overlay "3" at 565.168,298.268 h1.5 r180
U3: Top Overlay "1" at 541.79,298.675 h1.5 r180; Top Overlay "2" at 536.96,298.675 h1.5 r180; Top Overlay "3" at 539.5,298.675 h1.5 r180
U4: Top Overlay "1" at 536.178,282.037 h1.5; Top Overlay "2" at 541.008,282.037 h1.5; Top Overlay "3" at 538.468,282.037 h1.5
U6: Top Overlay "1" at 561.878,281.537 h1.5; Top Overlay "2" at 566.708,281.537 h1.5; Top Overlay "3" at 564.168,281.537 h1.5
U7: Top Overlay "1" at 418.301,292.21 h1.5 r90; Top Overlay "2" at 418.301,297.04 h1.5 r90; Top Overlay "3" at 418.301,294.5 h1.5 r90
U9: Top Overlay "1" at 418.301,313.288 h1.5 r90; Top Overlay "2" at 418.301,318.118 h1.5 r90; Top Overlay "3" at 418.301,315.578 h1.5 r90